# EAGLE board Motherboard_1 (EAGLE 9.2.0)
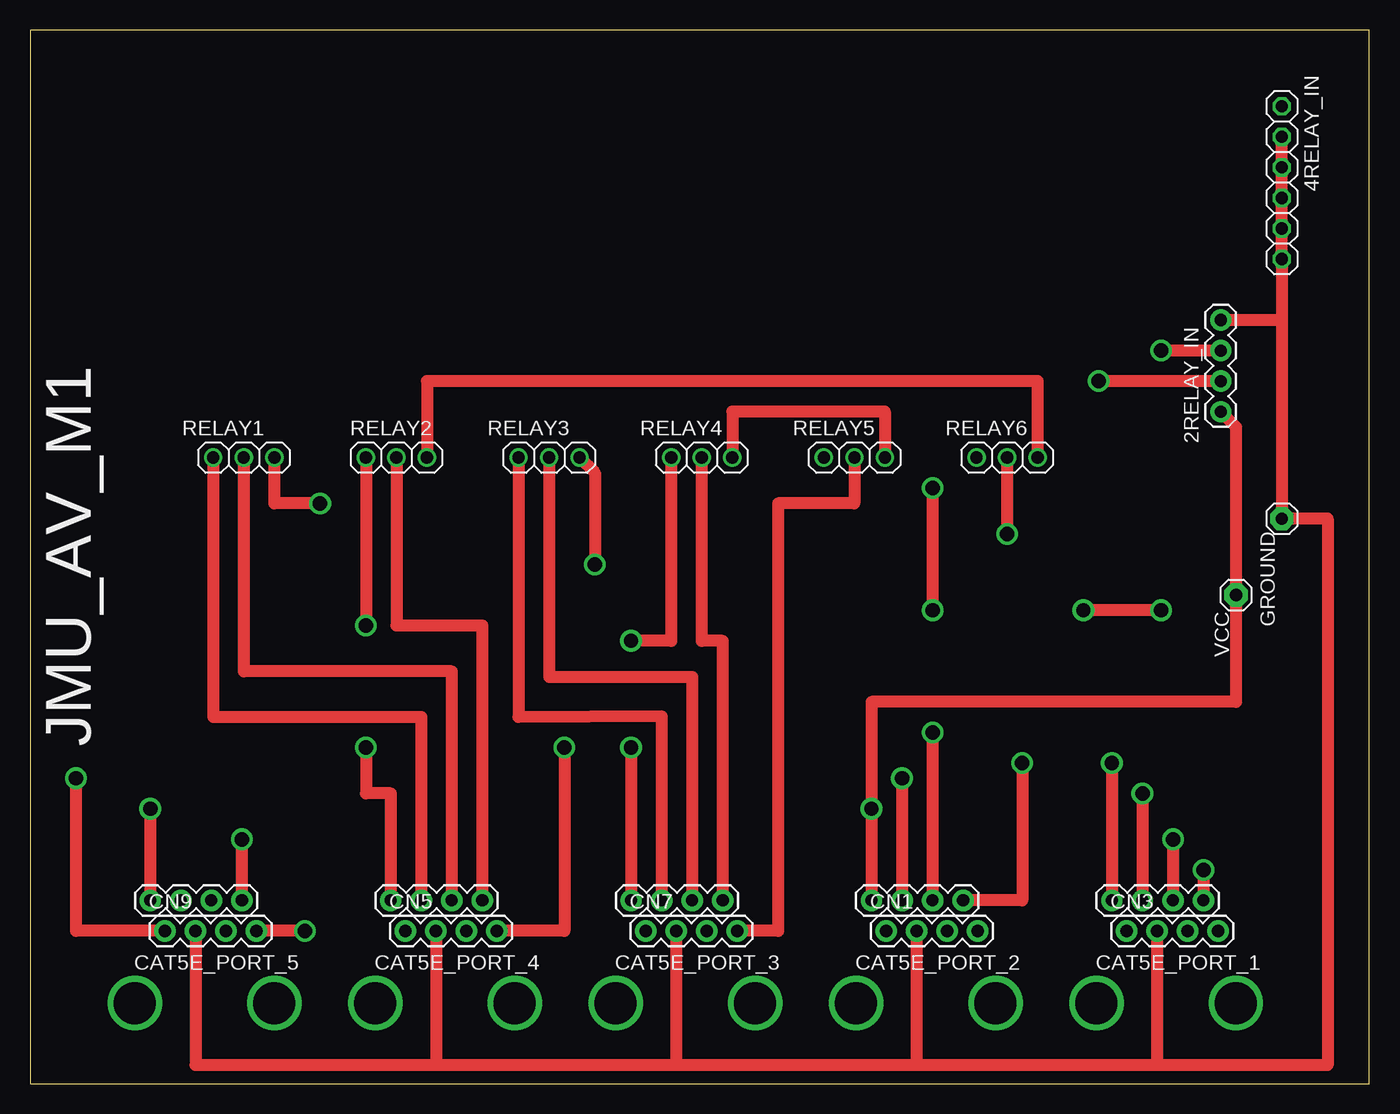
[diagram p0: board, top side]
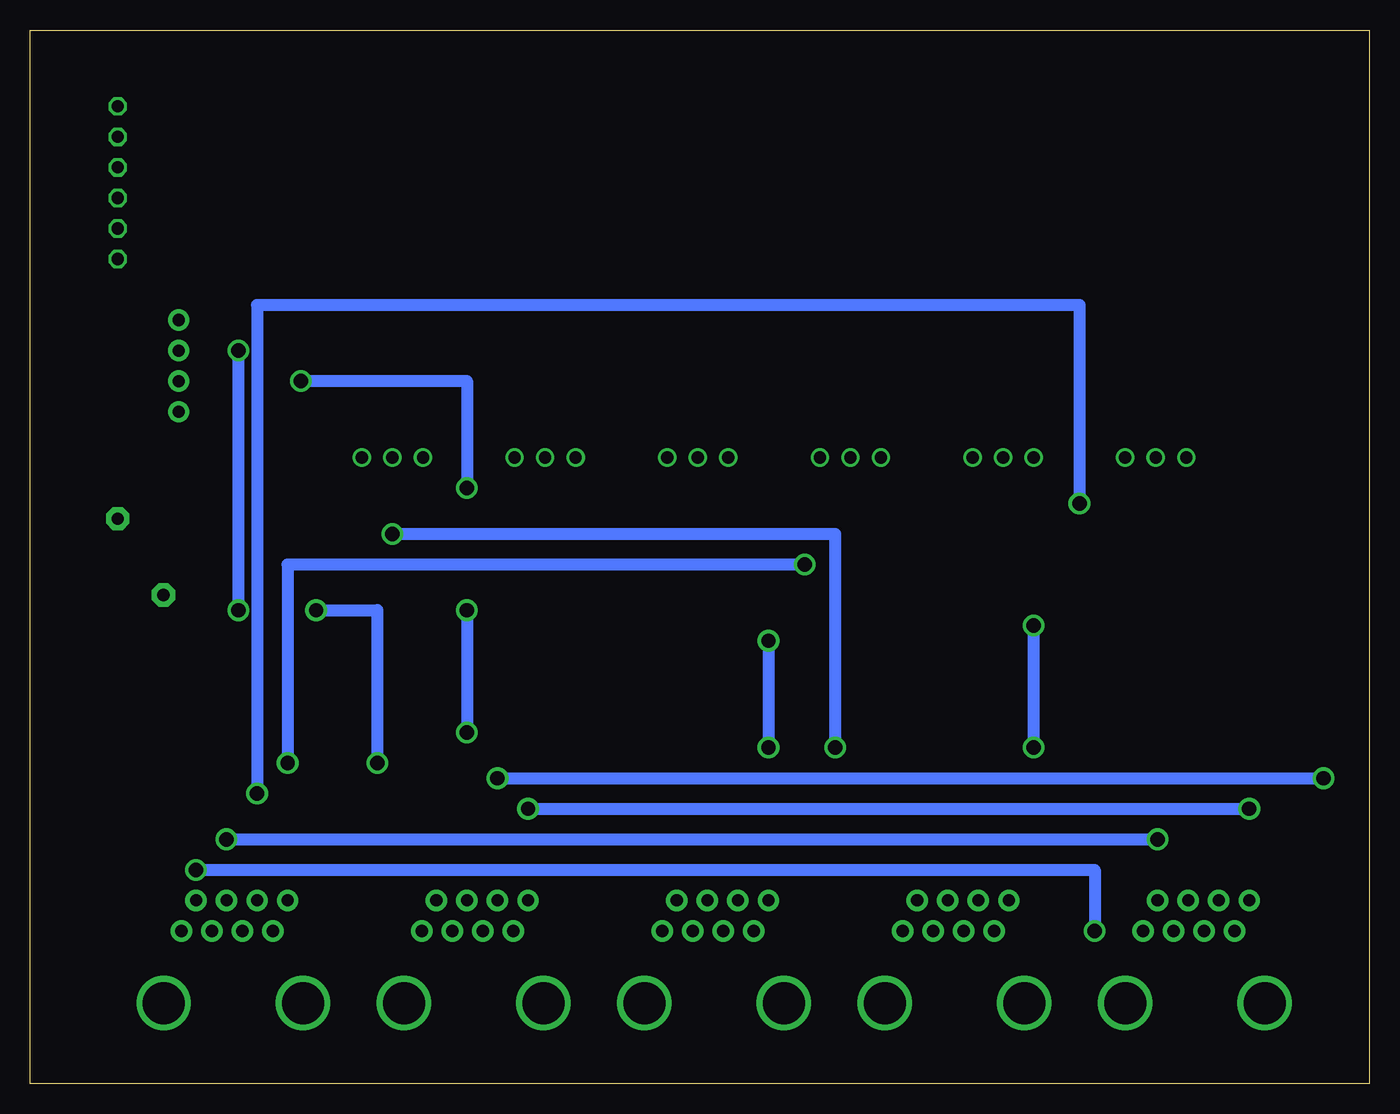
[diagram p1: board, bottom side, seen from below]

Size 111.43 x 87.62 mm. Coordinates in mm from the lower left corner, seen from the top.
Outline: 0,0 111.43,0 111.43,87.62 0,87.62 0,0
Copper layers (1*16): Top 0.035mm / dielectric 1.5mm / Bottom 0.035mm
Design rules "default": minimum track width 6mil, minimum drill 0.35mm, track to track 6mil, track to pad 6mil, pad to pad 6mil, via to via 6mil, smd to smd 6mil, copper to edge 40mil, drill to drill 6mil, minimum pad ring 10mil, minimum via ring 8mil, stop-mask expansion 4mil, vias tented up to drill 0mil, thermal gap 10mil
Net classes: 0 default: width 0.762 mm, drill 0.254 mm, clearance 0.025 mm

## Footprints (pad centres in the part's own frame; a part is rotated, then mirrored left to right if it is on the bottom)
1X04-BIG = drill 1.016 pad 1.778: 1 0,0; 2 2.54,0; 3 5.08,0; 4 7.62,0
1X06 = drill 1.016 octagon: 1 -6.35,0; 2 -3.81,0; 3 -1.27,0; 4 1.27,0; 5 3.81,0; 6 6.35,0
1X01 = drill 1.016 pad 1.93 octagon: 1 0,0
1X03 = drill 1.016: 1 -2.54,0; 2 0,0; 3 2.54,0

## Placement (x,y rotation side)
2RELAY_IN  1X4-BIG  [1X04-BIG]  99.06,55.88 90 top
4RELAY_IN  [1X06]  104.14,74.93 270 top
CAT5E_PORT_1  1X4-BIG  [1X04-BIG]  90,15.24 0 top
CAT5E_PORT_2  1X4-BIG  [1X04-BIG]  70,15.24 0 top
CAT5E_PORT_3  1X4-BIG  [1X04-BIG]  50,15.24 0 top
CAT5E_PORT_4  1X4-BIG  [1X04-BIG]  30,15.24 0 top
CAT5E_PORT_5  1X4-BIG  [1X04-BIG]  10,15.24 0 top
CN1  1X4-BIG  [1X04-BIG]  71.22,12.7 0 top
CN3  1X4-BIG  [1X04-BIG]  91.22,12.7 0 top
CN5  1X4-BIG  [1X04-BIG]  31.22,12.7 0 top
CN7  1X4-BIG  [1X04-BIG]  51.22,12.7 0 top
CN9  1X4-BIG  [1X04-BIG]  11.22,12.7 0 top
GROUND  [1X01]  104.14,46.99 90 top
RELAY1  [1X03]  17.78,52.07 0 top
RELAY2  [1X03]  30.48,52.07 0 top
RELAY3  [1X03]  43.18,52.07 0 top
RELAY4  [1X03]  55.88,52.07 0 top
RELAY5  [1X03]  68.58,52.07 0 top
RELAY6  [1X03]  81.28,52.07 0 top
VCC  [1X01]  100.33,40.64 90 top

## Library data of the parts
2RELAY_IN 4RELAY_IN CAT5E_PORT_1-CAT5E_PORT_5 CN1 CN3 CN5 CN7 CN9 GROUND RELAY1-RELAY6 VCC = adafruit

## Nets
N$11: CAT5E_PORT_4.1 RELAY2.1
N$12: CAT5E_PORT_4.2 RELAY1.1
N$13: CAT5E_PORT_4.3 RELAY1.2
N$14: CAT5E_PORT_4.4 RELAY2.2
N$15: CN5.4 RELAY6.2
N$16: 2RELAY_IN.3 CAT5E_PORT_2.4
N$17: CAT5E_PORT_3.1 RELAY4.1
N$18: CAT5E_PORT_3.2 RELAY3.1
N$19: CAT5E_PORT_3.4 RELAY4.2
N$20: RELAY2.3 RELAY6.3
N$21: RELAY4.3 RELAY5.3
N$22: CN7.4 RELAY5.2
N$23: CAT5E_PORT_1.1 RELAY3.3
N$24: CAT5E_PORT_3.3 RELAY3.2
N$25: CAT5E_PORT_1.2 RELAY1.3
N$26: CAT5E_PORT_1.3 CAT5E_PORT_5.4
N$27: CAT5E_PORT_1.4 CN9.4
N$28: CAT5E_PORT_2.2 CN9.1
N$29: 2RELAY_IN.1 CAT5E_PORT_2.1 CAT5E_PORT_5.1 VCC.1
N$30: 2RELAY_IN.4 4RELAY_IN.2 4RELAY_IN.3 4RELAY_IN.4 4RELAY_IN.5 4RELAY_IN.6 CN1.2 CN3.2 CN5.2 CN7.2 CN9.2 GROUND.1
N$31: 2RELAY_IN.2 CAT5E_PORT_2.3

## Tracks (layer width: path | path; a pad name or v marks a point on that pad's centre or on a via)
N$1  (via drill 3.5 pad 1.3)
  other vias: 68.72,6.7
N$2  (via drill 3.5 pad 1.3)
  other vias: 80.32,6.7
N$3  (via drill 3.5 pad 1.3)
  other vias: 88.72,6.7
N$4  (via drill 3.5 pad 1.3)
  other vias: 100.32,6.7
N$5  (via drill 3.5 pad 1.3)
  other vias: 28.72,6.7
N$6  (via drill 3.5 pad 1.3)
  other vias: 40.32,6.7
N$7  (via drill 3.5 pad 1.3)
  other vias: 48.72,6.7
N$8  (via drill 3.5 pad 1.3)
  other vias: 60.32,6.7
N$9  (via drill 3.5 pad 1.3)
  other vias: 8.72,6.7
N$10  (via drill 3.5 pad 1.3)
  other vias: 20.32,6.7
N$11  (via drill 1.2)
  Top 1.016: CAT5E_PORT_4.1 30,24.13 27.94,24.13 v27.94,27.94 | RELAY2.1 v27.94,38.1
  Bottom 1.016: v27.94,38.1 v27.94,27.94
N$12
  Top 1.016: RELAY1.1 15.24,30.48 32.54,30.48 CAT5E_PORT_4.2
N$13
  Top 1.016: CAT5E_PORT_4.3 35.08,34.29 17.78,34.29 RELAY1.2
N$14
  Top 1.016: CAT5E_PORT_4.4 37.62,38.1 30.48,38.1 RELAY2.2
N$15  (via drill 1.2)
  Top 1.016: RELAY6.2 v81.28,45.72 | v44.45,27.94 44.45,12.7 CN5.4
  Bottom 1.016: v81.28,45.72 44.45,45.72 v44.45,27.94
N$16  (via drill 1.2)
  Top 1.016: CAT5E_PORT_2.4 82.55,15.24 v82.55,26.67 | v94.1,39.37 v87.63,39.37 | 2RELAY_IN.3 v94.1,60.96
  Bottom 1.016: v82.55,26.67 82.55,39.37 v87.63,39.37 | v94.1,60.96 v94.1,39.37
N$17  (via drill 1.2)
  Top 1.016: RELAY4.1 53.34,36.83 v50,36.83 | v50,27.94 CAT5E_PORT_3.1
  Bottom 1.016: v50,36.83 v50,27.94
N$18
  Top 1.016: CAT5E_PORT_3.2 52.54,30.54 40.64,30.48 RELAY3.1
N$19
  Top 1.016: CAT5E_PORT_3.4 57.62,36.83 55.88,36.83 RELAY4.2
N$20
  Top 1.016: RELAY6.3 83.82,58.42 33.02,58.42 RELAY2.3
N$21
  Top 1.016: RELAY4.3 58.42,55.88 71.12,55.88 RELAY5.3
N$22
  Top 1.016: CN7.4 62.23,12.7 62.23,48.26 68.58,48.26 RELAY5.2
N$23  (via drill 1.2)
  Top 1.016: v90,26.67 CAT5E_PORT_1.1 | RELAY3.3 46.99,50.8 v46.99,43.18
  Bottom 1.016: v90,26.67 90,43.18 v46.99,43.18
N$24
  Top 1.016: CAT5E_PORT_3.3 55.08,33.81 43.18,33.81 RELAY3.2
N$25  (via drill 1.2)
  Top 1.016: v92.54,24.13 CAT5E_PORT_1.2 | RELAY1.3 20.32,48.26 v24.13,48.26
  Bottom 1.016: v92.54,24.13 92.54,64.77 24.13,64.77 v24.13,48.26
N$26  (via drill 1.2)
  Top 1.016: v17.62,20.32 CAT5E_PORT_5.4 | v95.08,20.32 CAT5E_PORT_1.3
  Bottom 1.016: v95.08,20.32 v17.62,20.32
N$27  (via drill 1.2)
  Top 1.016: v22.86,12.7 CN9.4 | v97.62,17.78 CAT5E_PORT_1.4
  Bottom 1.016: v22.86,12.7 22.86,17.78 v97.62,17.78
N$28  (via drill 1.2)
  Top 1.016: CN9.1 3.81,12.7 v3.81,25.4 | v72.54,25.4 CAT5E_PORT_2.2
  Bottom 1.016: v72.54,25.4 v3.81,25.4
N$29  (via drill 1.2)
  Top 1.016: v10,22.86 CAT5E_PORT_5.1 | CAT5E_PORT_2.1 v70,22.86 70,31.75 100.33,31.75 VCC.1 100.33,54.61 2RELAY_IN.1
  Bottom 1.016: v70,22.86 v10,22.86
N$30
  Top 1.016: CN5.2 33.76,1.54 | CN7.2 53.76,1.54 | CN1.2 73.76,1.54 | 53.76,1.54 33.76,1.54 | 73.76,1.54 53.76,1.54 | 93.76,1.54 73.76,1.54 | 93.76,1.54 107.95,1.54 107.95,46.99 GROUND.1 104.14,63.5 | CN9.2 13.76,1.54 33.76,1.54 | CN3.2 93.76,1.54 | 104.14,63.5 4RELAY_IN.6 4RELAY_IN.5 4RELAY_IN.4 4RELAY_IN.3 4RELAY_IN.2 | 104.14,63.5 2RELAY_IN.4
N$31  (via drill 1.2)
  Top 1.016: v75.08,29.21 CAT5E_PORT_2.3 | v75.08,49.53 v75.08,39.37 | 2RELAY_IN.2 v88.9,58.42
  Bottom 1.016: v75.08,39.37 v75.08,29.21 | v75.08,49.53 75.08,58.44 88.88,58.44 v88.9,58.42

## Text on the board
tPlace: JMU_AV_M1